# EAGLE board Bluetooth2layer (EAGLE 7.7.0)
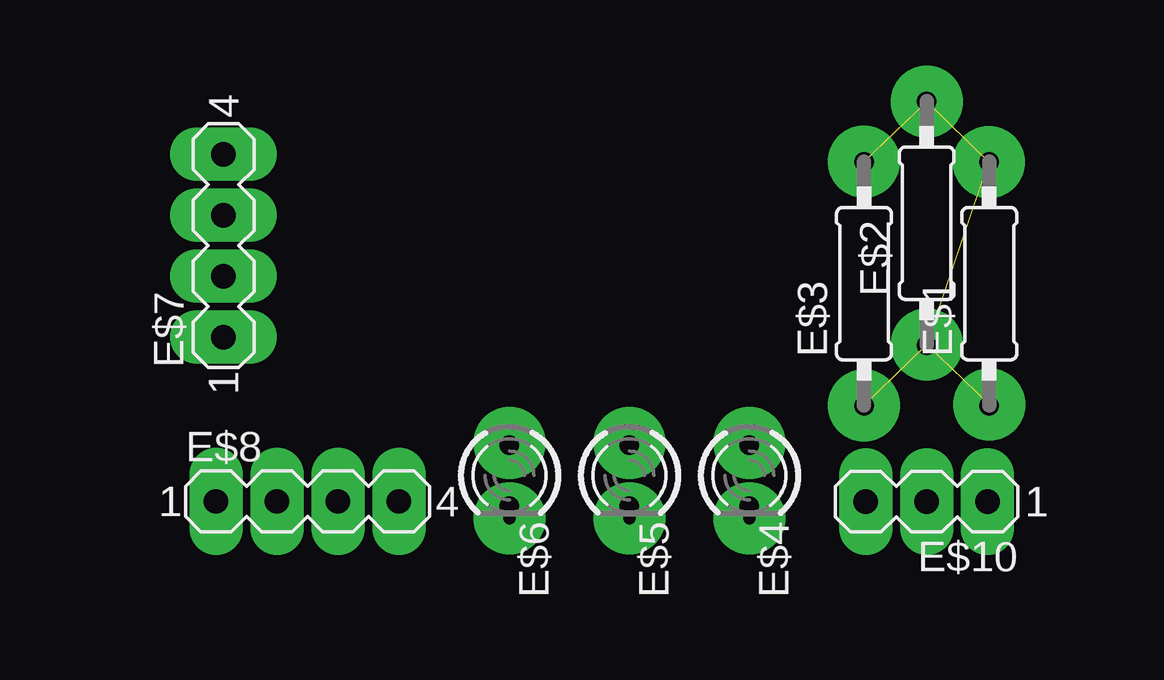
[diagram p0: board, top side]
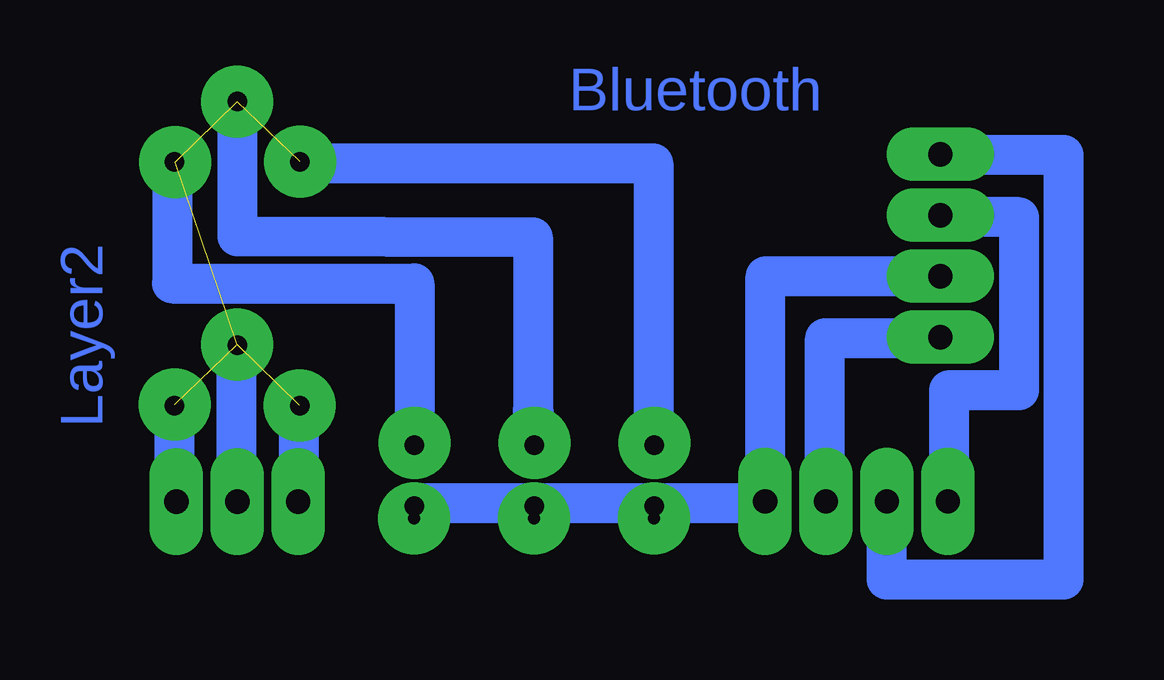
[diagram p1: board, bottom side, seen from below]

No outline drawn. Coordinates in mm, seen from the top.
Copper layers (1*16): Top 0.035mm / dielectric 1.5mm / Bottom 0.035mm
Design rules "default *": minimum track width 10mil, minimum drill 24mil, track to track 8mil, track to pad 8mil, pad to pad 8mil, via to via 8mil, smd to smd 8mil, copper to edge 40mil, drill to drill 8mil, minimum pad ring 10mil, minimum via ring 8mil, stop-mask expansion 4mil, vias tented up to drill 0mil, thermal gap 10mil

## Footprints (pad centres in the part's own frame; a part is rotated, then mirrored left to right if it is on the bottom)
0207/10 = drill 0.813 octagon: 1 -5.08,0; 2 5.08,0
LED3MM = drill 0.813 octagon: A -1.27,0; K 1.27,0
MA04-1 = drill 1.016 long: 1 -3.81,0; 2 -1.27,0; 3 1.27,0; 4 3.81,0
MA03-1 = drill 1.016 long: 1 -2.54,0; 2 0,0; 3 2.54,0

## Placement (x,y rotation side)
E$1  [0207/10]  78,64 90 top
E$2  [0207/10]  75.39,66.52 90 top
E$3  [0207/10]  72.78,64 90 top
E$4  [LED3MM]  68,56 270 top
E$5  [LED3MM]  63,56 270 top
E$6  [LED3MM]  58,56 270 top
E$7  [MA04-1]  46.08,65.58 90 top
E$8  [MA04-1]  49.58,54.92 0 top
E$10  [MA03-1]  75.39,54.91 180 top

## Library data of the parts
E$1-E$3 = rcl
E$4-E$6 = led
E$7 E$8 E$10 = con-lstb

## Tracks (layer width: path | path; a pad name or v marks a point on that pad's centre or on a via)
S$1  (via drill 0.5 pad 3)  (5 unrouted)
  other vias: 72.78,58.92 75.4,61.47 78,58.97 77.98,69.06 72.77,69.08 75.39,71.59 68.01,54.22 63.01,54.22 58.01,54.22 58,57.35 63,57.35 68,57.35
S$2
  Bottom 1.676: 72.8,54.92 72.8,58.71
S$3
  Bottom 1.676: 77.92,54.9 77.99,54.9 77.99,58.87
S$4
  Bottom 1.676: 75.39,54.97 75.42,54.97 75.42,61.42
S$5
  Bottom 1.676: 53.4,54.83 68.14,54.83 68.14,54.87
S$6
  Bottom 1.676: 78.11,69.02 78.11,64.01 68,64.01 68,57.17
S$7
  Bottom 1.676: 75.39,71.65 75.39,65.98 63.06,65.94 63.06,58.72 63.04,58.76 63.04,57.31
S$8
  Bottom 1.676: 72.82,69.02 58.04,69.02 58.03,60.82 58.03,57.4
S$9
  Bottom 1.676: 50.89,54.88 50.89,61.73 46.19,61.73
S$10
  Bottom 1.676: 53.37,54.91 53.37,64.31 46.06,64.31
S$11
  Bottom 1.676: 45.71,54.86 45.71,59.56 42.79,59.56 42.79,66.77 46.18,66.77
S$12
  Bottom 1.676: 48.33,54.9 48.33,51.66 40.94,51.66 40.94,69.36 46.14,69.36

## Text on the board
Bottom: Bluetooth | Layer2